# EAGLE board SUNFLOWER v2 (EAGLE 9.7.0)

Size 326.31 x 184.74 mm. Coordinates in mm from the lower left corner, seen from the top.
Outline: 0,0 326.31,0 326.31,184.74 0,184.74 0,0
Copper layers (1*16): Top 0.035mm / dielectric 1.5mm / Bottom 0.035mm
Design rules "default": minimum track width 6mil, minimum drill 0.35mm, track to track 6mil, track to pad 6mil, pad to pad 6mil, via to via 6mil, smd to smd 6mil, copper to edge 40mil, drill to drill 6mil, minimum pad ring 10mil, minimum via ring 8mil, stop-mask expansion 4mil, vias tented up to drill 0mil, thermal gap 10mil

## Footprints (pad centres in the part's own frame; a part is rotated, then mirrored left to right if it is on the bottom)
MOTOR = drill 1.118 pad 3.15 octagon: + 2.54,0; - -2.54,0
PIEZO = drill 1 pad 1.6: 1 -3.5,0; 2 3.5,0
28027 = drill 1.016 long: 1 -2.54,0; 2 0,0; 3 2.54,0
RESAD1016W63L850D250B = drill 0.83 pad 1.43: 1 -5.08,0; 2 5.08,0
GL5528 = drill 0.8 pad 1.4: 1 -1.702,0; 2 1.702,0
WS2812-STRIP = drill 1.016 long: 1 -3.81,0; 2 -1.27,0; 3 1.27,0; 4 3.81,0
SWITCH-SPDT-PTH-8.5X3.7MM = drill 1.016 pad 1.88: 1 -2.54,0; 2 0,0; 3 2.54,0
SG90 = drill 1.016 long: 1 -2.54,0; 2 0,0; 3 2.54,0
TO92 = drill 0.813 octagon: 1 -1.27,0; 2 0,1.905; 3 1.27,0
LCD-I2C = drill 1.016 long: 1 -19.05,-5.08; 2 -19.05,-7.62; 3 -19.05,-10.16; 4 -19.05,-12.7
ARDUINO-UNO-R3-SHIELD = drill 1.016 pad 1.88: 3.3V 24.13,-2.54; 5V 24.13,0; A0 24.13,12.7; A1 24.13,15.24; A2 24.13,17.78; A3 24.13,20.32; A4 24.13,22.86; A5 24.13,25.4; AREF -24.13,-13.97; D2 -24.13,20.32; D3 -24.13,17.78; D4 -24.13,15.24; D5 -24.13,12.7; D6 -24.13,10.16; D7 -24.13,7.62; D8 -24.13,3.81; D9 -24.13,1.27; D10 -24.13,-1.27; D11 -24.13,-3.81; D12 -24.13,-6.35; D13 -24.13,-8.89; GND@0 24.13,2.54; GND@1 24.13,5.08; GND@2 -24.13,-11.43; IOREF 24.13,-7.62; NC 24.13,-10.16; RES 24.13,-5.08; RX -24.13,25.4; SCL -24.13,-19.05; SDA -24.13,-16.51; TX -24.13,22.86; VIN 24.13,7.62

## Placement (x,y rotation side)
M1  MOTOR_HDR  [MOTOR]  222.81,96.16 0 top
PIEZO1  PIEZO  [PIEZO]  301.54,85.84 0 top
PIR1  PIR-SENSOR_28027  [28027]  272.68,143.66 0 top
R1  1k  [RESAD1016W63L850D250B]  150.21,171.03 90 top
R7  1k  [RESAD1016W63L850D250B]  96.07,41.75 0 top
R8  1k  [RESAD1016W63L850D250B]  96.06,29.18 0 top
R9  1k  [RESAD1016W63L850D250B]  96.01,18.44 0 top
R10  1k  [RESAD1016W63L850D250B]  95.92,7.53 0 top
R11  PHOTOCELL_GL5528  [GL5528]  114.18,28.69 0 top
R12  PHOTOCELL_GL5528  [GL5528]  114.32,18.03 0 top
R13  PHOTOCELL_GL5528  [GL5528]  114.39,6.99 0 top
R14  PHOTOCELL_GL5528  [GL5528]  114.23,41.6 0 top
RING1  WS2812B_STRIP  [WS2812-STRIP]  318.57,135.2 0 top
SDUST  TOGGLE  [SWITCH-SPDT-PTH-8.5X3.7MM]  219.94,74.13 0 top
SERVOHORIZONTAL  SERVOSG90  [SG90]  213.28,22.41 90 top
SERVOVERTICAL  SERVOSG90  [SG90]  212.87,43.61 90 top
SMODE_TOGGLE  TOGGLE  [SWITCH-SPDT-PTH-8.5X3.7MM]  205.63,55.49 0 top
SRAIN  TOGGLE  [SWITCH-SPDT-PTH-8.5X3.7MM]  234.58,73.91 0 top
SWIND  TOGGLE  [SWITCH-SPDT-PTH-8.5X3.7MM]  250.01,73.02 0 top
T1  NPN  [TO92]  150.21,178.65 0 top
U1  LCD-16X2-I2CSUNFOUNDER-IIC  [LCD-I2C]  30.73,96.02 0 top
U2  ARDUINO-UNO-R3-SHIELD  [ARDUINO-UNO-R3-SHIELD]  161.03,41.06 180 top

## Library data of the parts
M1 PIEZO1 PIR1 R1 R7-R14 RING1 SDUST SERVOHORIZONTAL SERVOVERTICAL SMODE_TOGGLE SRAIN SWIND U1 U2 = Tinkercad
T1 = Tinkercad; CATEGORY: Transistor; SUB-CATEGORY: BJT; TYPE: NPN

## Nets
M1_-: M1.- T1.1
T1_B: R1.2 T1.2
U2_5V: M1.+ PIR1.2 R11.2 R12.2 R13.2 R14.2 RING1.2 SDUST.1 SERVOHORIZONTAL.2 SERVOVERTICAL.2 SMODE_TOGGLE.3 SRAIN.1 SWIND.1 U1.2 U2.5V
U2_A0: R7.2 R14.1 U2.A0
U2_A1: R8.2 R11.1 U2.A1
U2_A2: R9.2 R12.1 U2.A2
U2_A3: R10.2 R13.1 U2.A3
U2_A4: U1.3 U2.A4
U2_A5: U1.4 U2.A5
U2_D2: PIR1.1 U2.D2
U2_D3: PIEZO1.1 U2.D3
U2_D4: RING1.1 U2.D4
U2_D5: R1.1 U2.D5
U2_D6: SERVOHORIZONTAL.3 U2.D6
U2_D7: SDUST.2 U2.D7
U2_D8: SERVOVERTICAL.3 U2.D8
U2_D9: SMODE_TOGGLE.2 U2.D9
U2_D11: SWIND.2 U2.D11
U2_D13: SRAIN.2 U2.D13
U2_GND: PIEZO1.2 PIR1.3 R7.1 R8.1 R9.1 R10.1 RING1.3 SDUST.3 SERVOHORIZONTAL.1 SERVOVERTICAL.1 SMODE_TOGGLE.1 SRAIN.3 SWIND.3 T1.3 U1.1 U2.GND@0 U2.GND@1 U2.GND@2

## Tracks (layer width: path | path; a pad name or v marks a point on that pad's centre or on a via)
M1_-  (1 unrouted)
T1_B  (1 unrouted)
U2_5V  (14 unrouted)
U2_A0  (2 unrouted)
U2_A1  (2 unrouted)
U2_A2  (2 unrouted)
U2_A3  (2 unrouted)
U2_A4  (1 unrouted)
U2_A5  (1 unrouted)
U2_D2  (1 unrouted)
U2_D3  (1 unrouted)
U2_D4  (1 unrouted)
U2_D5  (1 unrouted)
U2_D6  (1 unrouted)
U2_D7  (1 unrouted)
U2_D8  (1 unrouted)
U2_D9  (1 unrouted)
U2_D11  (1 unrouted)
U2_D13  (1 unrouted)
U2_GND  (17 unrouted)